# EAGLE board Wash_Hand_v1.2 (EAGLE 9.6.1)

Size 71.12 x 48.26 mm. Coordinates in mm from the lower left corner, seen from the top.
Outline: 0,46.99 0,0.76 arc90 0.76,0 69.85,0 arc90 71.12,1.27 71.12,46.99 arc90 69.85,48.26 1.27,48.26 arc90 0,46.99
Copper layers (1*16): Top 0.035mm / dielectric 1.5mm / Bottom 0.035mm
Design rules "default": minimum track width 6mil, minimum drill 0.35mm, track to track 6mil, track to pad 6mil, pad to pad 6mil, via to via 6mil, smd to smd 6mil, copper to edge 40mil, drill to drill 6mil, minimum pad ring 10mil, minimum via ring 8mil, stop-mask expansion 4mil, vias tented up to drill 0mil, thermal gap 10mil

## Footprints (pad centres in the part's own frame; a part is rotated, then mirrored left to right if it is on the bottom)
CAP-PTH-2.54 = drill 0.7 pad 1.651: 1 -1.27,0; 2 1.27,0
STAND-OFF = hole 3.302: 0,0
1X03 = drill 1.016 pad 1.88: 1 0,0; 2 2.54,0; 3 5.08,0
1X02 = drill 1.016 pad 1.88: 1 0,0; 2 2.54,0
2X3 = drill 1.016 pad 1.88: 1 0,0; 2 0,2.54; 3 2.54,0; 4 2.54,2.54; 5 5.08,0; 6 5.08,2.54
1X04 = drill 1.016 pad 1.88: 1 0,0; 2 2.54,0; 3 5.08,0; 4 7.62,0
1X01 = drill 1.016 pad 1.88: 1 0,0
HC49/S = drill 0.813: 1 -2.413,0; 2 2.413,0
RESISTOR = drill 0.762 pad 1.778: R_1 0,0; R_2 7.62,0
DIP28 = drill 0.813 pad 1.626: 1 -16.51,-3.81; 2 -13.97,-3.81; 3 -11.43,-3.81; 4 -8.89,-3.81; 5 -6.35,-3.81; 6 -3.81,-3.81; 7 -1.27,-3.81; 8 1.27,-3.81; 9 3.81,-3.81; 10 6.35,-3.81; 11 8.89,-3.81; 12 11.43,-3.81; 13 13.97,-3.81; 14 16.51,-3.81; 15 16.51,3.81; 16 13.97,3.81; 17 11.43,3.81; 18 8.89,3.81; 19 6.35,3.81; 20 3.81,3.81; 21 1.27,3.81; 22 -1.27,3.81; 23 -3.81,3.81; 24 -6.35,3.81; 25 -8.89,3.81; 26 -11.43,3.81; 27 -13.97,3.81; 28 -16.51,3.81
USB_MICROB_10118194_AMPHENOL = smd 0.4 x 1.35: 1 -1.3,4.15; 2 -0.65,4.15; 3 0,4.15; 4 0.65,4.15; 5 1.3,4.15 | smd 1.5 x 1.5: P$1 -1,1.45; P$2 1,1.45 | drill 0.85 pad 1.25: P$8 -2.5,4.15; P$9 2.5,4.15 | drill 1.15 pad 1.55: P$10 -3.5,1.45; P$11 3.5,1.45
HDSP-B0XE = drill 0.6: PIN12 -4.8,7.6; PIN$2 -4.8,-7.6; PIN$3 -2.4,-7.6; PIN$4 0,-7.6; PIN$5 2.3,-7.6; PIN$6 4.8,-7.6; PIN$7 7.2,-7.6; PIN$8 4.8,7.6; PIN$9 2.4,7.6; PIN$10 0,7.6; PIN$11 -2.4,7.6 | drill 0.6 square: PIN$1 -7.2,-7.6

## Placement (x,y rotation side)
C1  22pF  [CAP-PTH-2.54]  26.67,11.43 180 top
C2  22pF  [CAP-PTH-2.54]  26.67,19.05 180 top
H1  STAND-OFF  [STAND-OFF]  3.81,3.81 0 top
H2  STAND-OFF  [STAND-OFF]  67.31,3.81 0 top
H3  STAND-OFF  [STAND-OFF]  3.81,44.45 0 top
H4  STAND-OFF  [STAND-OFF]  66.04,17.78 0 bottom
H5  STAND-OFF  [STAND-OFF]  67.31,44.45 0 top
H6  STAND-OFF  [STAND-OFF]  66.04,24.13 0 top
J  D0 GND VCC ,  [1X03]  63.5,12.7 180 bottom
J1  I2C  [1X02]  11.43,5.08 0 top
J2  ICSP  [2X3]  52.07,5.08 0 top
J3  SPI  [1X04]  27.94,5.08 0 top
J4  INTERRUPT  [1X01]  17.78,5.08 0 top
J5  EXT_VCC  [1X02]  21.59,5.08 0 top
Q1  16.0 Mhz  [HC49/S]  34.29,15.24 90 top
R1  220K  [RESISTOR]  57.15,11.43 90 top
R2  220K  [RESISTOR]  3.81,20.32 90 top
R3  220K  [RESISTOR]  16.51,11.43 90 top
R4  220K  [RESISTOR]  41.91,11.43 90 top
R5  220K  [RESISTOR]  46.99,11.43 90 top
R6  220K  [RESISTOR]  52.07,11.43 90 top
R7  220K  [RESISTOR]  11.43,11.43 90 top
R8  220K  [RESISTOR]  21.59,11.43 90 top
R9  10K  [RESISTOR]  3.81,38.1 270 top
U1  328P  [DIP28]  33.53,31.5 0 top
U$4  USB_MICROB_10118194_AMPHENOL  [USB_MICROB_10118194_AMPHENOL]  1.27,12.7 270 top
U$5  HDSP-B04E  [HDSP-B0XE]  33.53,31.5 0 bottom

## Library data of the parts
C1 C2 = SparkFun-Capacitors; PROD_ID: CAP-09128
H1-H6 = SparkFun-Hardware
J J1 J4 J5 = SparkFun-Connectors
J2 = SparkFun-Connectors; PROD_ID: CONN-11566
J3 = SparkFun-Connectors; PROD_ID: CONN-09696
Q1 = adafruit; OC_FARNELL: 1667008; OC_NEWARK: unknown
R1-R9 U$4 U$5 = PCB_CLASS_PREMADE_COMPONENTS
U1 = SparkFun-IC-Microcontroller; PROD_ID: IC-09136

## Nets
0: C1.1 C2.1 J2.6 J5.1 J.2 U1.8 U1.22 U$4.5
A: R1.R_2 U$5.PIN$11
B: R2.R_2 U$5.PIN$7
C: R3.R_2 U$5.PIN$4
D: R4.R_2 U$5.PIN$2
D0: J.3 U1.23
D1: U1.14 U$5.PIN12
D2: U1.24 U$5.PIN$9
D3: U1.25 U$5.PIN$8
D4: U1.26 U$5.PIN$6
DP: R8.R_2 U$5.PIN$3
E: R5.R_2 U$5.PIN$1
F: R6.R_2 U$5.PIN$10
G: R7.R_2 U$5.PIN$5
INTERRUPT: J4.1 U1.4
MISO: J2.1 J3.2 U1.18
MOSI: J2.4 J3.3 U1.17
N$1: R3.R_1 U1.15
N$2: R1.R_1 U1.2
N$3: R5.R_1 U1.6
N$4: R7.R_1 U1.12
N$8: C1.2 Q1.2 U1.10
N$9: C2.2 Q1.1 U1.9
N$18: R8.R_1 U1.13
N$19: R6.R_1 U1.11
N$20: R4.R_1 U1.5
N$21: R2.R_1 U1.3
RESET: J2.5 R9.R_1 U1.1
SCK: J2.3 J3.4 U1.19
SCL: J1.2 U1.28
SDA: J1.1 U1.27
SS: J3.1 U1.16
VCC: J2.2 J5.2 J.1 R9.R_2 U1.7 U1.20 U1.21 U$4.1

## Tracks (layer width: path | path; a pad name or v marks a point on that pad's centre or on a via)
0  (7 unrouted)
A  (1 unrouted)
B  (1 unrouted)
C  (1 unrouted)
D  (1 unrouted)
D0  (1 unrouted)
D1  (1 unrouted)
D2  (1 unrouted)
D3  (1 unrouted)
D4  (1 unrouted)
DP  (1 unrouted)
E  (1 unrouted)
F  (1 unrouted)
G  (1 unrouted)
INTERRUPT  (1 unrouted)
MISO  (2 unrouted)
MOSI  (2 unrouted)
N$1  (1 unrouted)
N$2  (1 unrouted)
N$3  (1 unrouted)
N$4  (1 unrouted)
N$8  (2 unrouted)
N$9  (2 unrouted)
N$18  (1 unrouted)
N$19  (1 unrouted)
N$20  (1 unrouted)
N$21  (1 unrouted)
RESET  (2 unrouted)
SCK  (2 unrouted)
SCL  (1 unrouted)
SDA  (1 unrouted)
SS  (1 unrouted)
VCC  (7 unrouted)

## Text on the board
tNames: Copyright 2020 by / Konrad Rzeszutek Wilk | VCC GND D0 | 5V 500 mA | SDA SCL | INT | GND VCC | SS MISO MOSI SCK | VCC MOSI GND / MISO SCK RST
bNames: darnok.org | D0 GND VCC | 5V 500 mA | Wash Hands v1.2 | 2020-Jul-2